# EAGLE board example-brd (EAGLE 9.7.0)

Size 190.5 x 215.9 mm. Coordinates in mm from the lower left corner, seen from the top.
Outline: 0,0 190.5,0 190.5,215.9 0,215.9 0,0
Copper layers (1*16): Top 0.035mm / dielectric 1.5mm / Bottom 0.035mm
Design rules "default": minimum track width 6mil, minimum drill 0.35mm, track to track 6mil, track to pad 6mil, pad to pad 6mil, via to via 6mil, smd to smd 6mil, copper to edge 40mil, drill to drill 6mil, minimum pad ring 10mil, minimum via ring 8mil, stop-mask expansion 4mil, vias tented up to drill 0mil, thermal gap 10mil

## Footprints (pad centres in the part's own frame; a part is rotated, then mirrored left to right if it is on the bottom)
DIL16 = drill 0.813 long: 1 -8.89,-3.81; 2 -6.35,-3.81; 3 -3.81,-3.81; 4 -1.27,-3.81; 5 1.27,-3.81; 6 3.81,-3.81; 7 6.35,-3.81; 8 8.89,-3.81; 9 8.89,3.81; 10 6.35,3.81; 11 3.81,3.81; 12 1.27,3.81; 13 -1.27,3.81; 14 -3.81,3.81; 15 -6.35,3.81; 16 -8.89,3.81
RESAD1176W63L850D250B = drill 0.83 pad 1.43: 1 -5.88,0; 2 5.88,0
TESTPOINT = drill 0.6: P$1 0,0
DIP826W53P254L959H508Q8B = drill 0.786 pad 1.386: 1 -4.13,3.81; 2 -4.13,1.27; 3 -4.13,-1.27; 4 -4.13,-3.81; 5 4.13,-3.81; 6 4.13,-1.27; 7 4.13,1.27; 8 4.13,3.81
DIL40 = drill 0.813 long: 1 -24.13,-7.62; 2 -21.59,-7.62; 3 -19.05,-7.62; 4 -16.51,-7.62; 5 -13.97,-7.62; 6 -11.43,-7.62; 7 -8.89,-7.62; 8 -6.35,-7.62; 9 -3.81,-7.62; 10 -1.27,-7.62; 11 1.27,-7.62; 12 3.81,-7.62; 13 6.35,-7.62; 14 8.89,-7.62; 15 11.43,-7.62; 16 13.97,-7.62; 17 16.51,-7.62; 18 19.05,-7.62; 19 21.59,-7.62; 20 24.13,-7.62; 21 24.13,7.62; 22 21.59,7.62; 23 19.05,7.62; 24 16.51,7.62; 25 13.97,7.62; 26 11.43,7.62; 27 8.89,7.62; 28 6.35,7.62; 29 3.81,7.62; 30 1.27,7.62; 31 -1.27,7.62; 32 -3.81,7.62; 33 -6.35,7.62; 34 -8.89,7.62; 35 -11.43,7.62; 36 -13.97,7.62; 37 -16.51,7.62; 38 -19.05,7.62; 39 -21.59,7.62; 40 -24.13,7.62
DIL08 = drill 0.813 long: 1 -3.81,-3.81; 2 -1.27,-3.81; 3 1.27,-3.81; 4 3.81,-3.81; 5 3.81,3.81; 6 1.27,3.81; 7 -1.27,3.81; 8 -3.81,3.81
DIL14 = drill 0.813 long: 1 -7.62,-3.81; 2 -5.08,-3.81; 3 -2.54,-3.81; 4 0,-3.81; 5 2.54,-3.81; 6 5.08,-3.81; 7 7.62,-3.81; 8 7.62,3.81; 9 5.08,3.81; 10 2.54,3.81; 11 0,3.81; 12 -2.54,3.81; 13 -5.08,3.81; 14 -7.62,3.81

## Placement (x,y rotation side)
J1  DIP16SOCKET  [DIL16]  46.57,105.25 90 top
J2  DIP16SOCKET  [DIL16]  28.47,60.98 90 top
R3  1K  [RESAD1176W63L850D250B]  67.49,108.44 180 top
TP1  TESTPOINT  [TESTPOINT]  24.13,106.68 0 top
U1  LM555_DIP  [DIP826W53P254L959H508Q8B]  44.34,196.41 180 top
U2  HD6821P  [DIL40]  49.97,154.04 90 top
U3  HD6821P  [DIL40]  49.95,53.5 90 top
U4  SN75452BP  [DIL08]  78.95,198.97 180 top
U5  SN75452BP  [DIL08]  79.04,186.23 180 top
U6  SN75452BP  [DIL08]  79.22,173.73 180 top
U7  SN75452BP  [DIL08]  79.39,160.85 180 top
U8  74AS08N  [DIL14]  77.12,142.08 90 top
U9  74AS08N  [DIL14]  77.15,121.83 90 top
U10  74LS174N  [DIL16]  77.47,83.74 90 top
U11  74LS174N  [DIL16]  76.99,56.06 90 top
U12  74ALS27N  [DIL14]  76.76,26.88 90 top
U13  74LS174N  [DIL16]  95.3,121.71 90 top
U14  74180N  [DIL14]  95.02,68.69 90 top
U16  74180N  [DIL14]  119.84,139.74 270 top
U17  74LS123N  [DIL16]  119.63,111.97 90 top
U18  SN15836N  [DIL14]  119.61,83.64 90 top
U25  SN75452BP  [DIL08]  140.12,95.87 180 top

## Library data of the parts
J1 J2 TP1 U2 U3 = owen-library
R3 = Resistor; CATEGORY: Resistor; SUB-CATEGORY: Fixed
U1 = IC_Clock-Timing; CATEGORY: IC_Clock-Timing; CURRENT-SUPPLY: 10mA; DESCRIPTION: IC OSC SINGLE TIMER 100KHZ 8-DIP; FREQUENCY: 100kHz; MANUFACTURER: Texas Instruments; MPN: LM555CN/NOPB; OPERATING_TEMP: 0°C to 70°C; PART_STATUS: Active; ROHS_COMPLIANT: ROHS3 Compliant; SUB-CATEGORY: Timer
U4-U7 U25 = texas-sn55-sn75
U8-U13 U17 = 74xx-us
U14 U16 = 74ttl-din
U18 = owen-library; CATEGORY: IC_Logic; SUB-CATEGORY: Inverter

## Nets
+UB: U14.14 U16.14
+V: R3.1
-UB: U14.7 U16.7
GND: J1.1 J1.2 J1.3 J1.4 J1.5 J1.6 J1.7 J1.8 J2.9 J2.10 J2.11 J2.12 J2.13 J2.14 J2.15 U1.1 U4.4 U5.4 U6.4 U7.4 U8.7 U9.7 U10.8 U11.8 U12.7 U13.8 U17.8 U18.7 U25.4
N$1: J1.9 U2.33 U3.33
N$2: J1.10 U2.32 U3.32
N$3: J1.11 U2.31 U3.31
N$4: J1.12 U2.30 U3.30
N$5: J1.13 U2.29 U3.29
N$6: J1.14 U2.28 U3.28
N$7: J1.15 U2.27 U3.27
N$8: J1.16 U2.26 U3.26
N$9: J2.16 U3.38
N$10: U3.22 U18.8
N$11: TP1.P$1 U2.40 U17.1
N$12: R3.2 U3.40
N$13: U2.39 U17.3
U17: J2.1 U2.22 U18.9
V+: U1.8
VCC: U4.8 U5.8 U6.8 U7.8 U8.14 U9.14 U10.16 U11.16 U12.14 U13.16 U17.16 U18.14 U25.8

## Tracks (layer width: path | path; a pad name or v marks a point on that pad's centre or on a via)
GND  (28 unrouted)
N$12  (1 unrouted)